# Altium PCB UART_Logger.PcbDoc
Units mm, origin at the board's own origin, x right, y up, seen from the top; angles counter-clockwise.
Board outline 33.25 x 36.95 mm, 2 copper layers (Top Layer, Bottom Layer); 56 components, 48 nets, 230 pads, 111 vias.
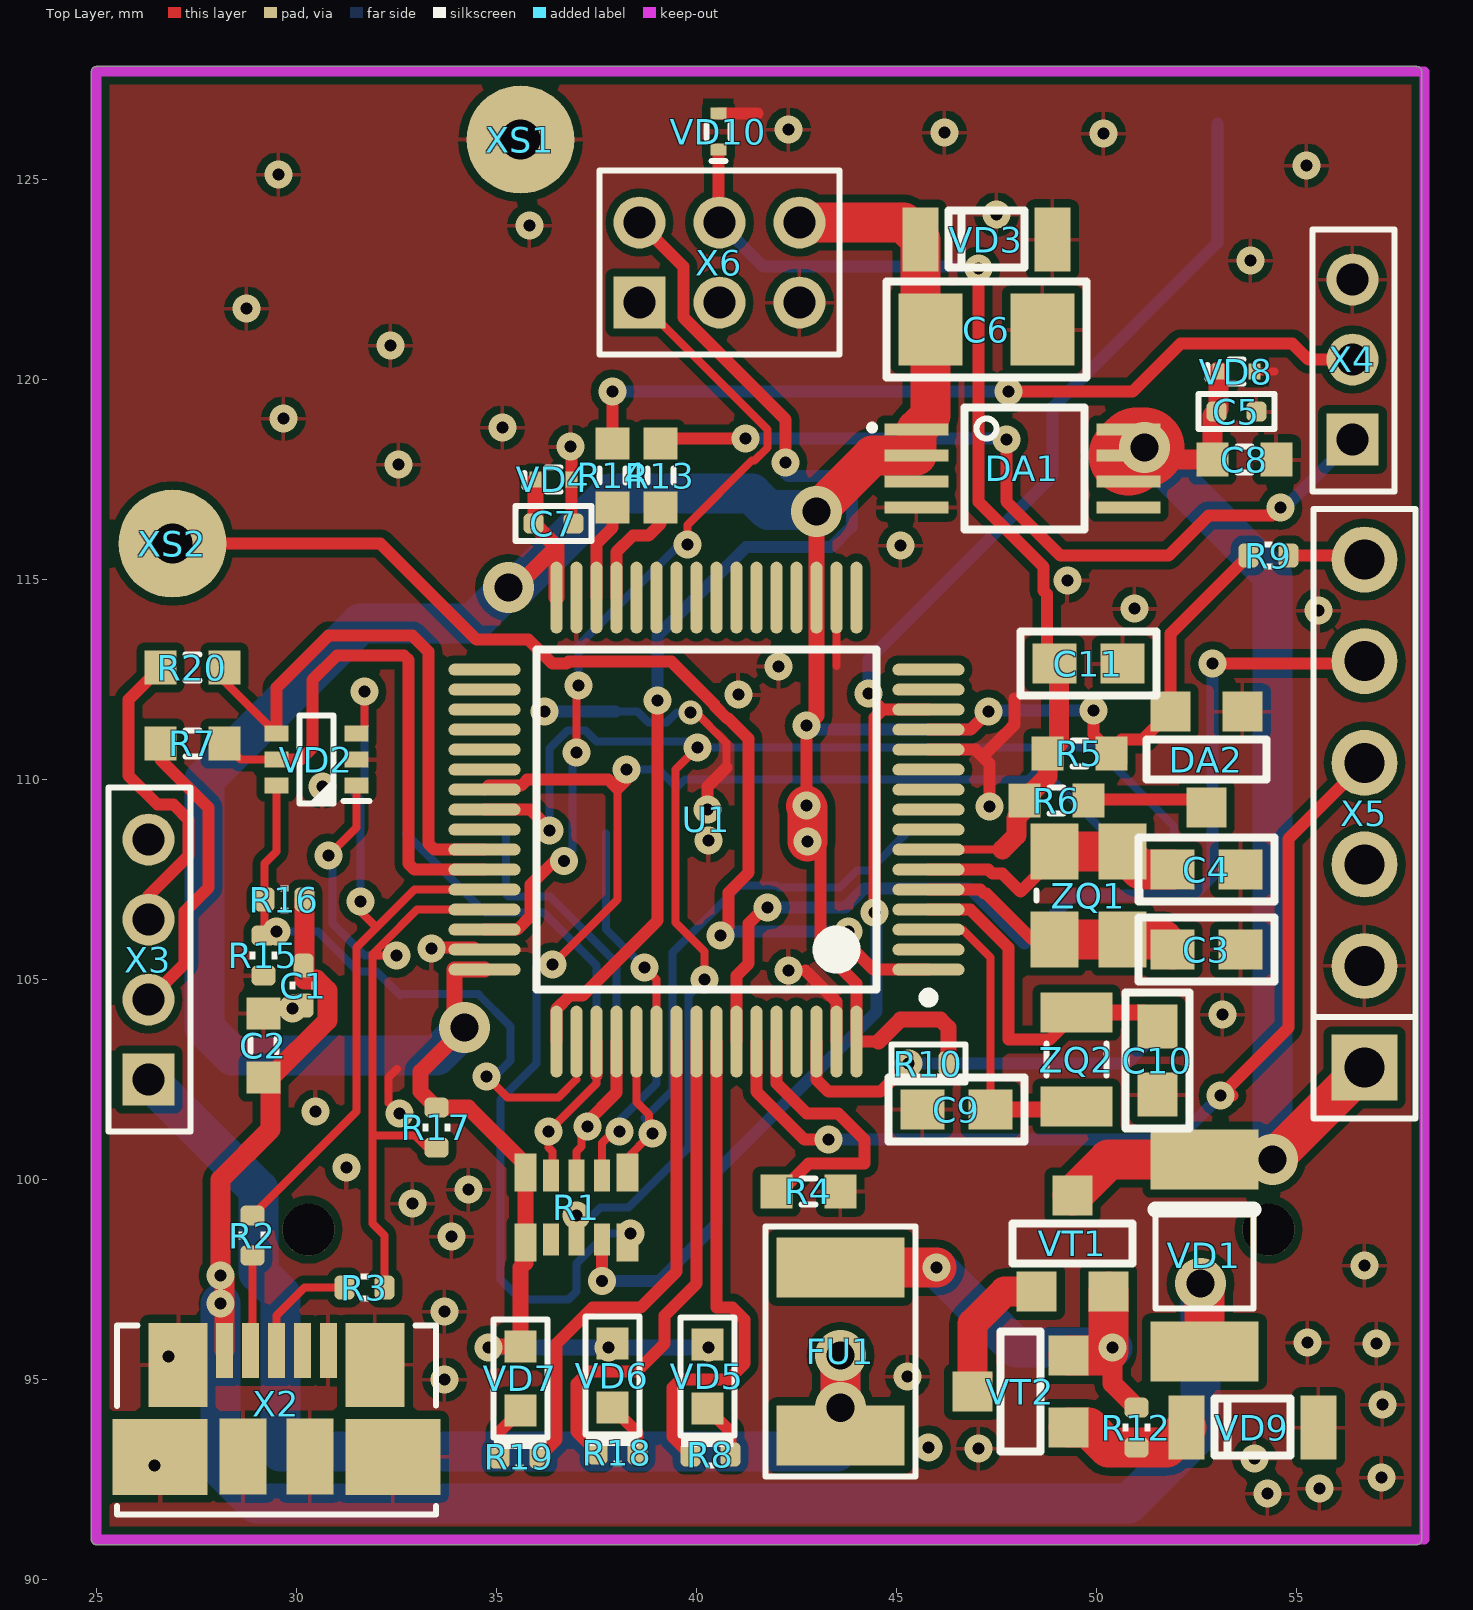
[diagram p0: Top Layer view]
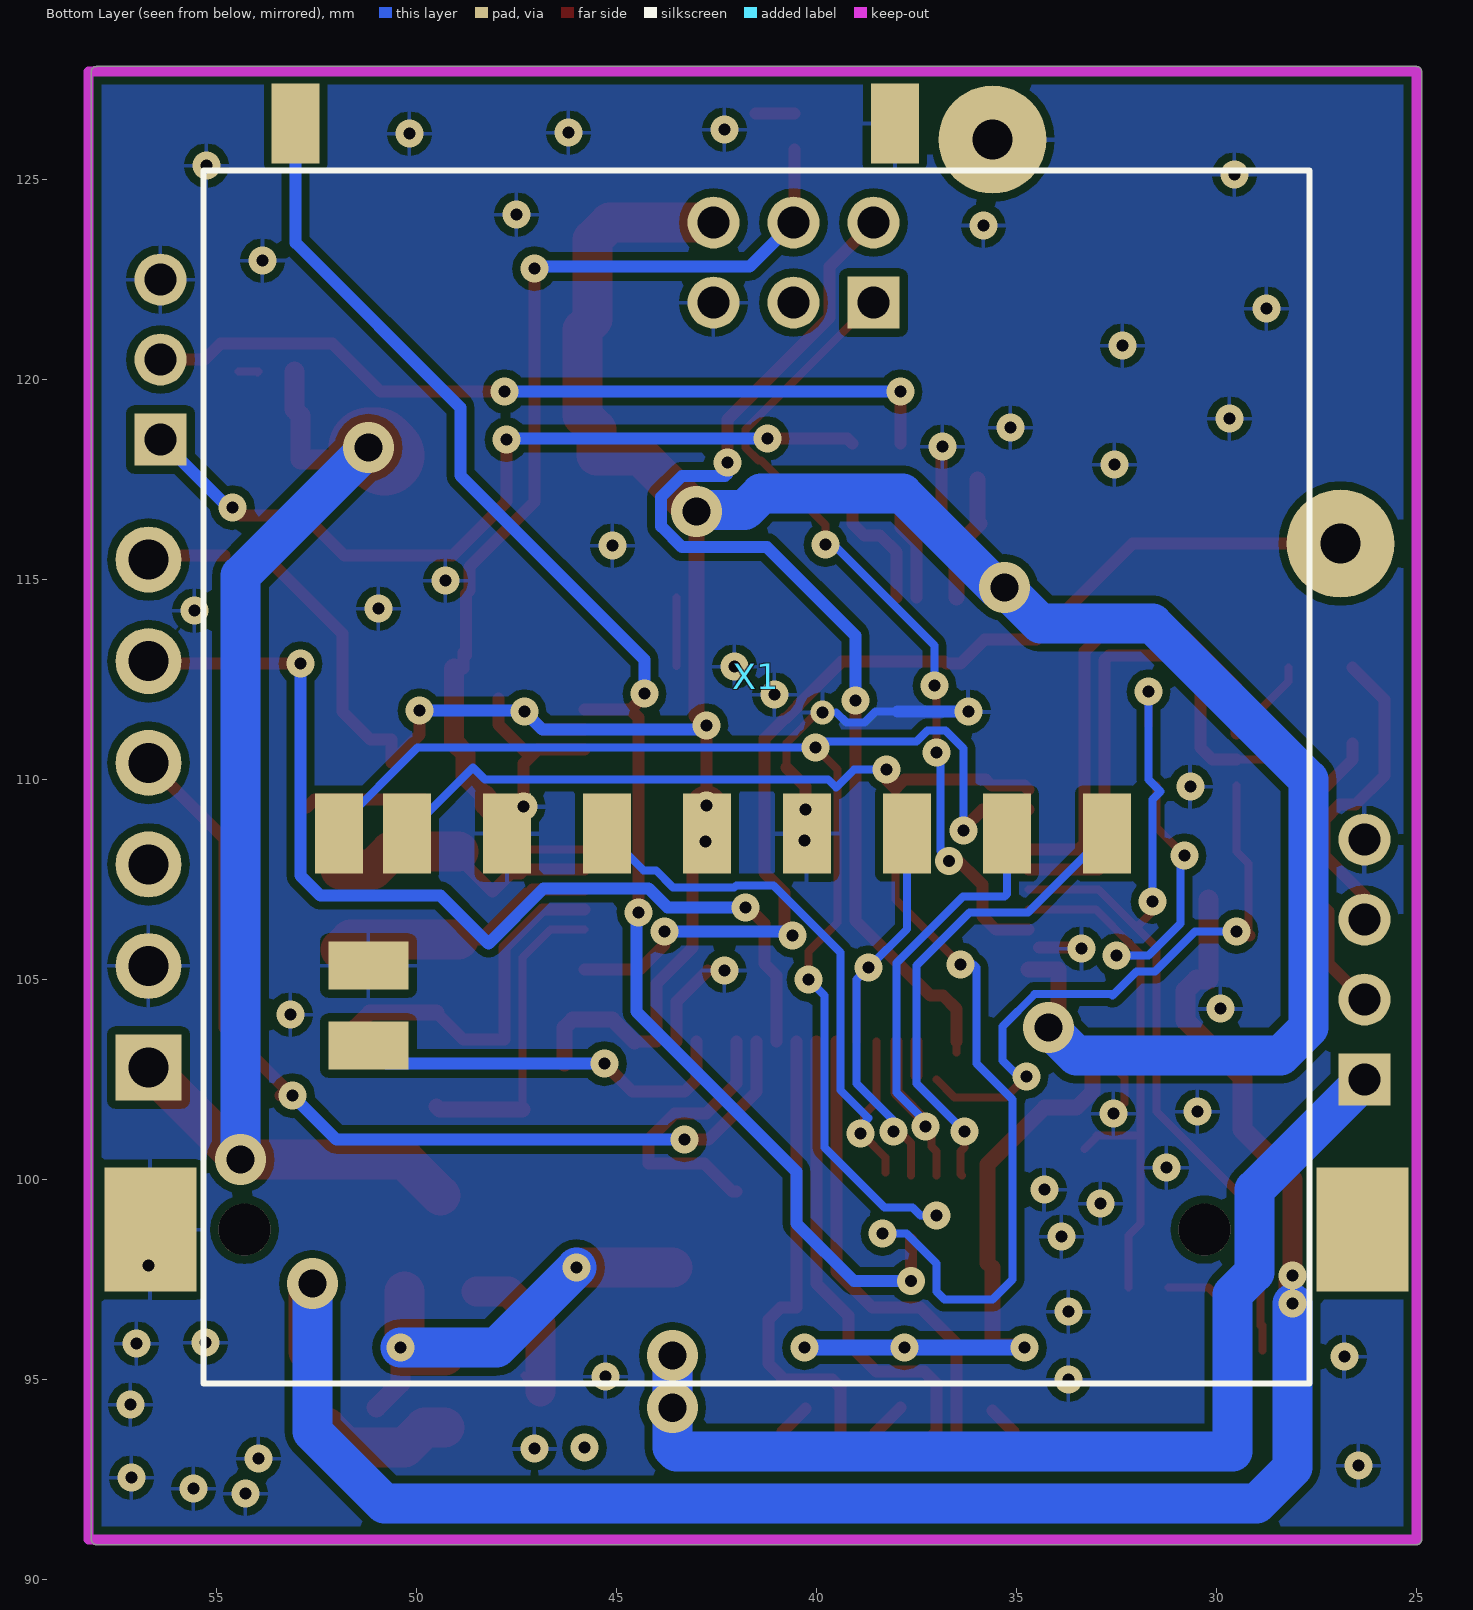
[diagram p1: Bottom Layer view, seen from below]
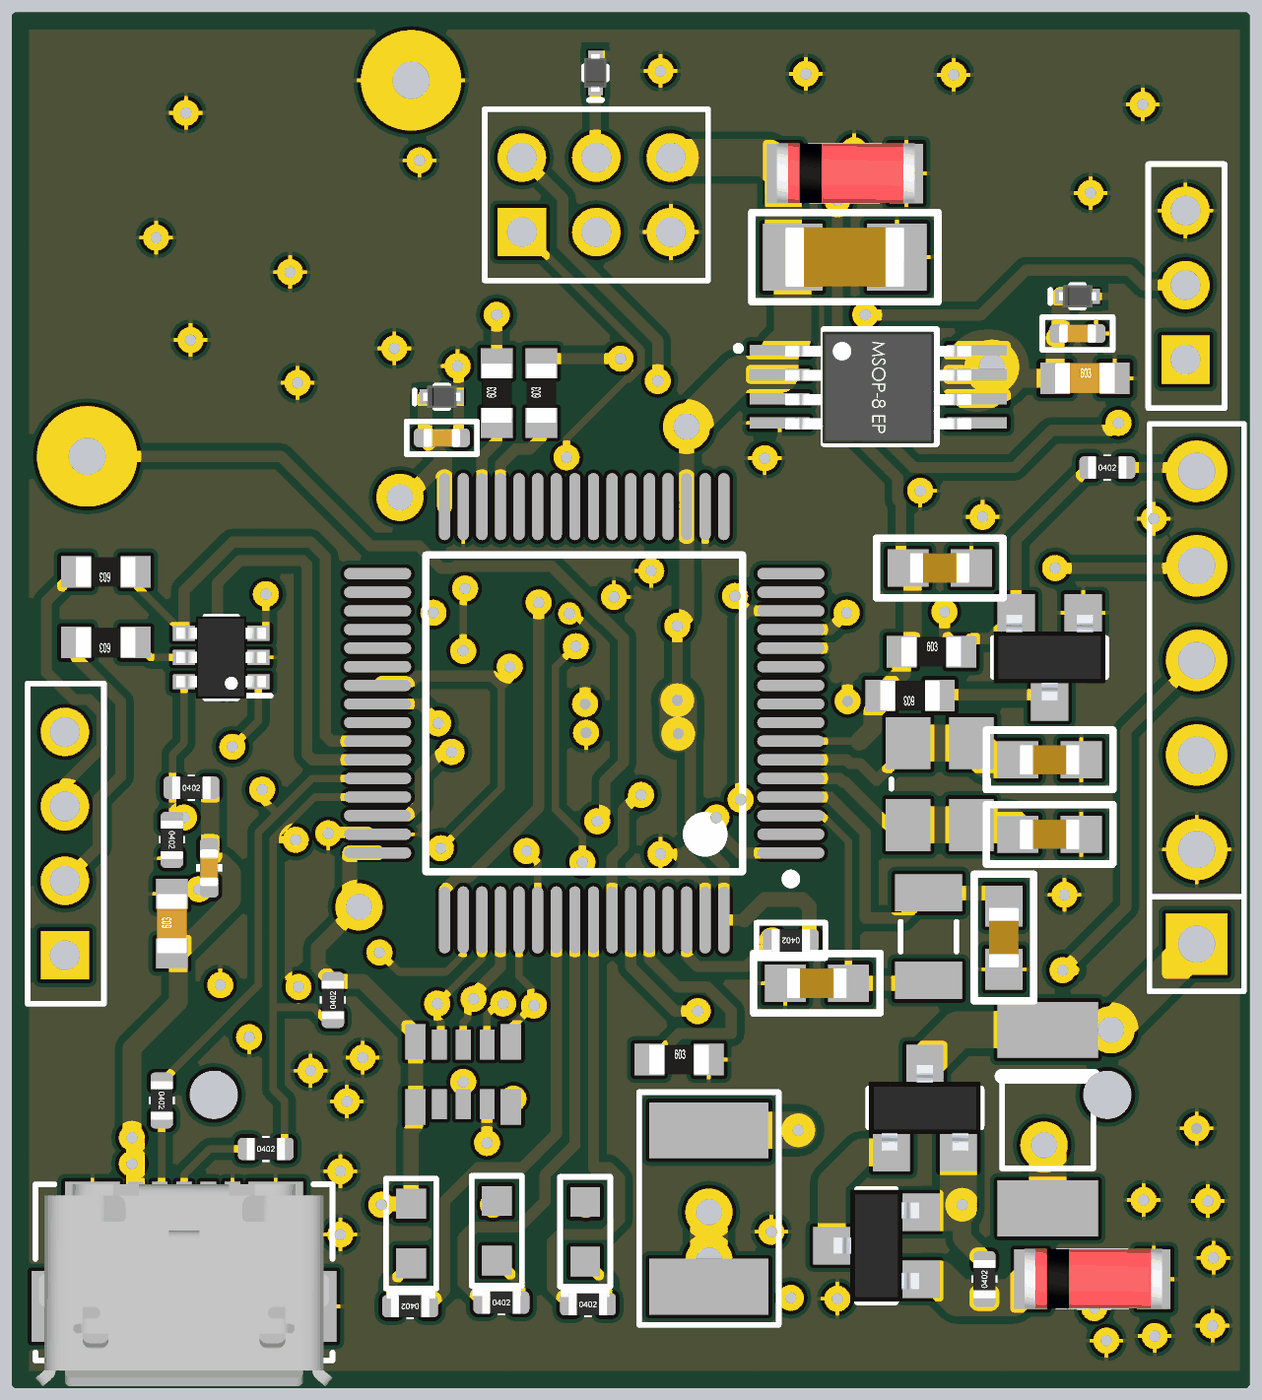
[diagram p2: 3D render of the assembled board from above, using the file's embedded part models]

## Layer stack, top to bottom
Top Solder: solder mask 0.0102, Solder Resist, Dk 3.5
Top Layer: signal copper 0.0356
Dielectric 1: dielectric 0.32, FR-4, Dk 4.8
Bottom Layer: signal copper 0.0356
Bottom Solder: solder mask 0.0102, Solder Resist, Dk 3.5

## Board outline
25.002,90.873 cw(c25,91) 24.873,91 24.873,127.7 cw(c25,127.7) 25,127.827 58,127.827 cw(c58,127.7) 58.127,127.7 58.127,91 cw(c58,91) 58,90.873

## Design rules (kind name [scope] priority, off if disabled: settings)
Clearance "Any-same nets" [All] p1: gap=0.1 ignorepadtopadclearanceinfootprint=FALSE except(0: Arc-Hole Track-Hole SMDPad-Hole THPad-Hole Via-Hole Fill-Hole Poly-Hole Region-Hole Text-Hole; 0.2: Arc-Poly Track-Track Track-Poly SMDPad-Poly THPad-Poly Via-Poly Fill-Poly Poly-Poly) // все, кроме настроек одинаковых цепей
DiffPairsRouting [All] p1: maxlimit=0.5 minlimit=0.1 mostfreqgap=0.2 toplayer_minwidth=0.1 toplayer_maxwidth=0.4 toplayer_prefwidth=0.3 bottomlayer_minwidth=0.1 bottomlayer_maxwidth=0.4 bottomlayer_prefwidth=0.3 maxuncoupledlength=0.2
MatchedLengths MatchLengths_xSignals_U1_ZQ2 [InxSignalClass('xSignals_U1_ZQ2_MatchLengthsClass')] p1: tolerance=1 checknetsindiffpair=FALSE checkdiffpairvsdiffpair=TRUE checkxsignals=TRUE checkothers=TRUE
MatchedLengths MatchLengths_U1_Passives_X2 [InxSignalClass('xSignals_U1_Passives_X2_MatchLengthsClass')] p2: tolerance=1 checknetsindiffpair=FALSE checkdiffpairvsdiffpair=TRUE checkxsignals=TRUE checkothers=TRUE
MatchedLengths MatchLengths_xSignals_U1_Passives [InxSignalClass('xSignals_U1_Passives_MatchLengthsClass')] p3: tolerance=1 checknetsindiffpair=FALSE checkdiffpairvsdiffpair=TRUE checkxsignals=TRUE checkothers=TRUE
MatchedLengths MatchLengths_xSignals_U1_X2 [InxSignalClass('xSignals_U1_X2_MatchLengthsClass')] p4: tolerance=1 checknetsindiffpair=FALSE checkdiffpairvsdiffpair=TRUE checkxsignals=TRUE checkothers=TRUE
MatchedLengths [All] p5: tolerance=1 checknetsindiffpair=TRUE checkdiffpairvsdiffpair=FALSE checkxsignals=FALSE checkothers=FALSE
PlaneClearance [All] p1: clearance=0.5
PlaneConnect [All] p1: planeconnectstyle=Relief reliefexpansion=0.508 reliefentries=2 reliefconductorwidth=0.1 reliefairgap=0.3
PolygonConnect [All] p1: connectstyle=Relief reliefconductorwidth=0.1 reliefentries=4 polygonreliefangle="90 Angle" airgapwidth=0.2
RoutingVias [All] p1: holewidth=0.3 width=0.7 viastyle="Through Hole" minholewidth=0.3 minwidth=0.6 maxholewidth=0.7 maxwidth=1.27
SolderMaskExpansion [All] p1: expansion=0.102
Width IN [InNet('IN')] p1: maxlimit=5 minlimit=0.5 preferedwidth=2
Width 3V3 [InNet('3V3')] p2: maxlimit=1 minlimit=0.2 preferedwidth=0.4
Width [All] p3: maxlimit=2 minlimit=0.2 preferedwidth=0.3
27 further rules are at their usual default settings.

## Components (designator, comment, footprint, x,y, rotation, side; value= is the part's Value field where it differs from the comment)
C1 "C0402-X7R-16В-0.1мкФ" C0402_min 30.175,104.85 r90 top value="0.1 мкФ"
C2 "C0603-X5R-6.3В-4.7мкФ±20%" C0603_HD 29.175,103.35 r90 top value="4.7 мкФ"
C3 "C0603-X7R-50В-12нФ" C0603 52.75,105.75 r0 top value="12 нФ"
C4 "C0603-X7R-50В-12нФ" C0603 52.75,107.75 r0 top value="12 нФ"
C5 "C0402-X7R-16В-0.1мкФ-10%" C0402_HD 53.5,119.2 r180 top value="0.1 мкФ"
C6 "C1206-X5R-10В-47мкФ-20%" C1206 47.25,121.25 r180 top value="47 мкФ"
C7 "C0402-X7R-16В-0.1мкФ-10%" C0402_HD 36.425,116.4 r180 top value="0.1 мкФ"
C8 "C0603-X5R-16В-10мкФ" C0603_HD 53.7,118 r0 top value="10 мкФ"
C9 "C0603-X7R-50В-7 нФ" C0603 46.5,101.75 r180 top value="7 нФ"
C10 "C0603-X7R-50В-7 нФ" C0603 51.525,102.975 r270 top value="7 нФ"
C11 "C0603-X7R-50В-22нФ" C0603 49.8,112.9 r180 top value="22 нФ"
DA1 "NCP3335ADM330R2G" TSSOP-8 45.5,118.75 r0 top
DA2 "MAX809SEUR, LM809M3-2.93 (NSC), STM809SWX6F (ST)" SOT-23 52.75,110.5 r180 top
FU1 "MF-MSMF020/60-2" MF-MSMF020/60 43.6,93.6 r90 top
R1 "CAY17-103JA" CAY17-103JALF 37,99.3 r180 top
R2 "R0402-39Ом-5%" R0402_min 28.9,98.6 r270 top value="39 Ом"
R3 "R0402-39Ом-5%" R0402_min 31.7,97.3 r0 top value="39 Ом"
R4 "R0603-10кОм-5%" R0603_HD 42.8,99.7 r0 top value="10 кОм"
R5 "R0603-10кОм-5%" R0603_HD 49.575,110.65 r0 top value="10 кОм"
R6 "R0603- 4.7 кОм-5%" R0603_HD 49,109.475 r180 top value="4.7 кОм"
R7 "R0603-10Ом-5%" R0603_HD 27.4,110.9 r180 top value="10 Ом"
R8 "R0402-1кОм-5%" R0402_min 40.35,93.125 r0 top value=1кОм
R9 "R0402-1кОм-5%" R0402_min 54.3,115.6 r0 top value=1кОм
R10 "R0402-10кОм-5%" R0402_HD 45.8,102.9 r180 top value="10 кОм"
R12 "R0402-10кОм-5%" R0402_min 51,93.8 r90 top value=10кОм
R13 "R0603-10Ом-5%" R0603_HD 39.1,117.6 r90 top value="10 Ом"
R14 "R0603-10Ом-5%" R0603_HD 37.9,117.6 r90 top value="10 Ом"
R15 "R0402-39кОм-5%" R0402_min 29.175,105.6 r270 top value="39 кОм"
R16 "R0402-24кОм-5%" R0402_min 29.7,107 r0 top value="24 кОм"
R17 "R0402-1кОм-5%" R0402_min 33.5,101.3 r90 top value=1кОм
R18 "R0402-1кОм-5%" R0402_min 38.025,93.175 r0 top value=1кОм
R19 "R0402-1кОм-5%" R0402_min 35.575,93.075 r180 top value=1кОм
R20 "R0603-10Ом-5%" R0603_HD 27.4,112.8 r180 top value="10 Ом"
U1 "STM32F103RCT6" STM-LQFP64_N 40.25,109 r180 top
VD1 "SM4007" DO-213AB_ 52.7,98.1 r270 top
VD2 "SMF05C" SOT-363 30.5,110.5 r180 top
VD3 "BZV55-C3V6" sod80c 47.25,123.5 r180 top
VD4 "ESD9L3.3ST5G" "SOD-923 (ON)" 36.425,117.5 r0 top
VD5 "KP1608ZGC" LED_0603 40.275,95.075 r270 top
VD6 "KP1608ZGC" LED_0603 37.9,95.1 r270 top
VD7 "KP1608ZGC" LED_0603 35.6,95.025 r270 top
VD8 "ESD9L5.0ST5G" "SOD-923 (ON)" 53.5,120.2 r0 top
VD9 "BZV55-C5V6" sod80c 53.9,93.8 r180 top
VD10 "ESD9L3.3ST5G" "SOD-923 (ON)" 40.55,126.2 r90 top
VT1 "MMBTA42" SOT-23 49.4,98.4 r0 top
VT2 "MMBTA42" SOT-23 48.1,94.7 r90 top
X1 "Attend 104G-TAA0-R" "Attend 104G-TAA0-R (SD holder)" 42.3,94.9 r180 bottom
X2 "Molex 47346-1001" "MicroUSB 047346-0001 Molex" 29.5,94.4 r90 top
X3 "n/m PLS-4" PLS2-4 26.3,102.5 r0 top
X4 "n/m" pls2-3 56.4,118.5 r0 top
X5 "n/m PLS-6" PLS-06 56.7,102.8 r90 top
X6 "n/m" PLD2-6 38.575,121.925 r0 top
XS1 "CONNECT PAD" Connection_pad 35.6,126 r0 top
XS2 "CONNECT PAD" Connection_pad 26.9,115.9 r0 top
ZQ1 "DSX321G 12 MHz, 10ppm@25C, 20ppm@-40+85C, 80 Ohm, 12pF (1C212000AB0AB)" DSX321G 49.8,107.1 r270 top value="12 МГц"
ZQ2 "DST310S 32.768 kHz, 20ppm, 50 kOhm, 7pF (1TJF0SPDJ1AI00D)" DST310S 49.5,103 r270 top value="32.768 кГц"

## Footprints (in the part's own frame and the unit in brackets; to place one, negate y for a bottom-side part, rotate by r counter-clockwise, add the part's x,y. Pads: shape width x height; smd on the part's side, far side on the other; paste and mask are expansions set on the pad)
"Attend 104G-TAA0-R (SD holder)" [mm]
  rect 1.2x2 smd: 1(7.06,13.75) 2(4.56,13.75) 3(2.06,13.75) 4(-0.44,13.75) 5(-2.94,13.75) 6(-5.44,13.75) 7(-7.94,13.75) 8(-9.64,13.75) 9(9.56,13.75) CD(-10.72,31.5) GND(4.26,31.5)
  rect 2.3x3.1 smd: GND(-14.35,3.85) Mount(15.95,3.85)
  rect 2x1.2 smd: GND(-8.9,10.45) WP(-8.9,8.45)
  round 1.3 hole 1.3 unplated: "Mount Hole"(-12,3.85) "Mount Hole"(12,3.85)
  silkscreen extent -13.02,0 14.62,30.32, body extent -13.03,0 14.62,30.32, height 3.3
C0402_HD [mm]
  rrect50% 0.5x0.5 smd: 1(0.5,0) 2(-0.5,0)
  silkscreen extent -0.95,-0.44 0.94,0.44, body extent -0.5,-0.25 0.5,0.25, height 0.48
C0402_min [mm]
  rrect50% 0.6x0.5 smd: 1(-0.5,0) 2(0.5,0)
  silkscreen extent -0.1,-0.35 0.1,0.35, body extent -0.5,-0.25 0.5,0.25, height 0.48
C0603 [mm] "1608M"
  rect 1.1x1 smd: 1(-0.85,0) 2(0.85,0)
  silkscreen extent -1.7,-0.8 1.7,0.8, body extent -0.8,-0.4 0.8,0.4, height 0.91
C0603_HD [mm]
  rect 0.8x0.85 smd: 1(-0.8,0) 2(0.8,0)
  silkscreen extent -0.17,-0.32 0.17,0.33, body extent -0.8,-0.4 0.8,0.4, height 0.3
C1206 [mm] "3216M"
  rect 1.6x1.8 smd: 1(-1.4,0) 2(1.4,0)
  silkscreen extent -2.5,-1.2 2.5,1.2, body extent -1.6,-0.8 1.6,0.8, height 1.01
CAY17-103JALF [mm]
  rect 0.55x0.95 smd: 1(-1.28,-0.875) 5(1.28,-0.875) 6(-1.28,0.875) 10(1.28,0.875)
  rect 0.4x0.8 smd: 2(-0.64,-0.8) 3(0,-0.8) 4(0.64,-0.8) 7(-0.64,0.8) 8(0,0.8) 9(0.64,0.8)
Connection_pad [mm]
  round 2.7 hole 1: 1(0,0)
DO-213AB_ [mm]
  rect 1.5x2.7 smd: 1(2.4,0) 2(-2.4,0)
  silkscreen extent -1.15,-1.22 1.33,1.22, body extent -2.52,-1.25 2.48,1.25, height 2.5
DST310S [mm]
  rect 1x1.8 smd: 1(-1.175,0) 2(1.175,0)
  silkscreen extent -0.4,-0.75 0.4,0.75, body extent -1.6,-0.75 1.6,0.75, height 0.85
DSX321G [mm]
  rect 1.4x1.2 smd: 1(-1.1,-0.85) 2(1.1,-0.85) 3(1.1,0.85) 4(-1.1,0.85)
  silkscreen extent -0.13,-1.3 0.13,1.3, body extent -1.6,-1.3 1.6,1.3, height 1
LED_0603 [mm]
  rect 0.8x0.8 smd: 1(-0.8,0) 2(0.8,0)
  silkscreen extent -1.47,-0.67 1.75,0.67, body extent -0.8,-0.4 0.8,0.4, height 1.1
MF-MSMF020/60 [mm]
  rect 1.5x3.2 smd: 1(0,0) 2(4.2,0)
  silkscreen extent -1.03,-1.87 5.23,1.88, body extent -0.63,-1.7 4.83,1.7, height 1
"MicroUSB 047346-0001 Molex" [mm]
  rect 1.38x0.42 smd mask+0.1: 1(1.33,1.3) 2(1.33,0.65) 3(1.33,0) 4(1.33,-0.65) 5(1.33,-1.3)
  rect 1.9x2.375 smd mask+0.1: 6(-1.33,2.912) 6(-1.33,-2.912)
  rect 1.9x1.175 smd mask+0.1: 6(-1.329,-0.836) 6(-1.329,0.836)
  rect 2.1x1.475 smd mask+0.1: 6(0.97,2.462) 6(0.97,-2.462)
  silkscreen extent -2.78,-3.99 1.95,3.99, body extent -3.48,-3.99 1.95,3.99, height 2.67
PLD2-6 [mm]
  rect 1.3x1.3 hole 0.8: 1(0,0)
  round 1.3 hole 0.8: 2(0,2) 3(2,0) 4(2,2) 5(4,0) 6(4,2)
  silkscreen extent -1,-1.3 5,3.3
pls2-3 [mm]
  rect 1.3x1.3 hole 0.8: 1(0,0)
  round 1.3 hole 0.8: 2(0,2) 3(0,4)
  silkscreen extent -1,-1.3 1.05,5.25
PLS2-4 [mm]
  rect 1.3x1.3 hole 0.8: 1(0,0)
  round 1.3 hole 0.8: 2(0,2) 3(0,4) 4(0,6)
  silkscreen extent -1,-1.3 1.05,7.3
PLS-06 [mm]
  rect 1.65x1.65 hole 1: 1(0,0)
  round 1.65 hole 1: 2(2.54,0) 3(5.08,0) 4(7.62,0) 5(10.16,0) 6(12.7,0)
  silkscreen extent -1.27,-1.27 13.97,1.27
R0402_HD [mm]
  rrect50% 0.5x0.6 smd: 1(-0.5,0) 2(0.5,0)
  silkscreen extent -0.92,-0.48 0.92,0.48, body extent -0.52,-0.3 0.52,0.3, height 0.34
R0402_min [mm]
  rrect50% 0.5x0.6 smd: 1(-0.5,0) 2(0.5,0)
  silkscreen extent -0.1,-0.35 0.1,0.35, body extent -0.52,-0.3 0.52,0.3, height 0.34
R0603_HD [mm]
  rect 0.8x0.85 smd: 1(-0.8,0) 2(0.8,0)
  silkscreen extent -0.18,-0.32 0.17,0.33, body extent -0.8,-0.4 0.8,0.4, height 0.3
sod80c [mm]
  rect 0.9x1.6 smd: 1(-1.65,0) 2(1.65,0)
  silkscreen extent -0.95,-0.73 0.95,0.7, body extent -1.88,-0.81 1.82,0.79, height 1.61
"SOD-923 (ON)" [mm]
  rect 0.3x0.4 smd mask+0.05: 1(-0.45,0) 2(0.45,0)
  Top Layer pour cut-out: 0.075,0.375 0.825,0.375 0.825,-0.375 0.075,-0.375
  Top Layer pour cut-out: -0.075,-0.375 -0.825,-0.375 -0.825,0.375 -0.075,0.375
  silkscreen extent -0.73,-0.3 0.17,0.3, body extent -0.5,-0.3 0.5,0.3, height 0.4
SOT-23 [mm] "КТ-46"
  rect 1x1 smd: 1(-0.9,-1.2) 2(0,1.2) 3(0.9,-1.2)
  silkscreen extent -1.5,-0.5 1.5,0.5, body extent -1.5,-1.15 1.5,1.15, height 1.11
SOT-363 [mm]
  rect 0.6x0.4 smd: 1(-1,0.65) 2(-1,0) 3(-1,-0.65) 4(1,-0.65) 5(1,0) 6(1,0.65)
  silkscreen extent -1.33,-1.1 0.43,1.1, body extent -1.2,-1.1 1.2,1.1, height 1.1
STM-LQFP64_N [mm] "Thin QFP, 64-Leads, Body 10x10mm, Pitch 0.5mm, IPC Medium Density"
  oval 1.8x0.3 smd: 1(-5.55,3.75) 2(-5.55,3.25) 3(-5.55,2.75) 4(-5.55,2.25) 5(-5.55,1.75) 6(-5.55,1.25) 7(-5.55,0.75) 8(-5.55,0.25) 9(-5.55,-0.25) 10(-5.55,-0.75) 11(-5.55,-1.25) 12(-5.55,-1.75) 13(-5.55,-2.25) 14(-5.55,-2.75) 15(-5.55,-3.25) 16(-5.55,-3.75) 33(5.55,-3.75) 34(5.55,-3.25) 35(5.55,-2.75) 36(5.55,-2.25) 37(5.55,-1.75) 38(5.55,-1.25) 39(5.55,-0.75) 40(5.55,-0.25) 41(5.55,0.25) 42(5.55,0.75) 43(5.55,1.25) 44(5.55,1.75) 45(5.55,2.25) 46(5.55,2.75) 47(5.55,3.25) 48(5.55,3.75)
  oval 0.3x1.8 smd: 17(-3.75,-5.55) 18(-3.25,-5.55) 19(-2.75,-5.55) 20(-2.25,-5.55) 21(-1.75,-5.55) 22(-1.25,-5.55) 23(-0.75,-5.55) 24(-0.25,-5.55) 25(0.25,-5.55) 26(0.75,-5.55) 27(1.25,-5.55) 28(1.75,-5.55) 29(2.25,-5.55) 30(2.75,-5.55) 31(3.25,-5.55) 32(3.75,-5.55) 49(3.75,5.55) 50(3.25,5.55) 51(2.75,5.55) 52(2.25,5.55) 53(1.75,5.55) 54(1.25,5.55) 55(0.75,5.55) 56(0.25,5.55) 57(-0.25,5.55) 58(-0.75,5.55) 59(-1.25,5.55) 60(-1.75,5.55) 61(-2.25,5.55) 62(-2.75,5.55) 63(-3.25,5.55) 64(-3.75,5.55)
  silkscreen extent -5.68,-4.25 4.25,4.57, body extent -5,-5 5,5, height 1.6
TSSOP-8 [mm]
  rect 1.6x0.3 smd: 1(0,0) 2(0,-0.65) 3(0,-1.3) 4(0,-1.95) 5(5.3,-1.95) 6(5.3,-1.3) 7(5.3,-0.65) 8(5.3,0)
  silkscreen extent -1.18,-2.5 4.2,0.55, body extent 0.15,-2.5 5.15,0.5, height 1.09

## Part data
C1 C3 C4 C9 C10 C11: library part C0603
C2 C8: library part C0603_HD
C5 C7: library part C0402
C6: library part C1206
DA1: library part ADP3335ARM-3.3
DA2: library part LM809M3-2.93
FU1: library part MF-MSMF
R1: library part CAY17
R2 R3 R8 R9 R10 R12 R15 R16 R17 R18 R19: library part R0402
R4 R5 R6 R7 R13 R14 R20: library part R0603
U1: "ARM Cortex-M3 32-bit MCU, 256 KB Flash, 48 KB Internal RAM, 51 I/Os, 64-pin LQFP, -40 to 85 degC, Tray", I/Os (High Current)=51, Operating Frequency(F) (Processor speed) (MHz)=72, Supplier Part Number 1=497-9033-ND, Supply Voltage(Vcc) min (V)=2, A/D Converter="3x12-bit (16 Channel)", ComponentLink1Description="Manufacturer URL", ComponentLink1URL=http://www.st.com/web/en/home.html, ComponentLink2Description=Datasheet, ComponentLink2URL=http://www.st.com/st-web-ui/static/active/en/resource/technical/document/datasheet/CD00191185.pdf, ComponentLink3Description="Package Specification", ComponentLink3URL=http://www.st.com/st-web-ui/static/active/en/resource/technical/document/datasheet/DM00037051.pdf, Core="ARM Cortex-M3", D/A Converter="2x12-bit (2 Channel)", DatasheetVersion="Rev. 8", FLASH Size (Prog) (kB)=256, Internal RAM Size (kB)=48, Mounting Technology="Surface Mount", PackageDescription="64-Pin Low Profile Quad Flat Package, 10 x 10 mm Body, 0.5 mm Pitch", PackageReference=LQFP64, PackageVersion="Rev. 4, 06/2013", Packing=Tray, PartNumber=STM32F103RCT6, Supplier 1=Digi-Key, Supplier 2=Newark, Supplier 3=Newark, Supplier 4=Mouser, Supplier Part Number 2=01P4099, Supplier Part Number 3=57P1227, Supplier Part Number 4=511-STM32F103RCT6
VD1: library part SM400x
VD3 VD9: library part BZV55
VD5 VD6 VD7: library part LED_0603
VT1 VT2: library part MMBT5551
X1: library part "Attend 104G-TAA0-R (SD holder)"
X2: library part "MicroUSB 047346-0001 Molex"
X3: library part PLS2-4
X4: library part PLS2-3
X5: library part PLS-6
X6: library part PLD2-6
ZQ1: library part DSX321G

## Via types
v1: diameter 0.7, hole 0.3, Top Layer to Bottom Layer, 102 vias
v2: diameter 1.27, hole 0.7, Top Layer to Bottom Layer, 7 vias
v3: diameter 1.27, hole 0.711, Top Layer to Bottom Layer, 1 vias
v4: diameter 0.6, hole 0.3, Top Layer to Bottom Layer, 1 vias

## Nets (pads, with @x,y where several pads share a name; then routed paths per layer and width w, separated by ;. In a path a pad name is that pad's centre, name@x,y a point inside that pad or via, vN(x,y) a via of type N, cw(c..) or ccw(c..) an arc to the next point about the centre after c; other vN are vias at no path point)
3V3: C6.2 C7.1 DA1.1 DA1.2 DA1.3 DA2.3 R1.5 R1.10 R5.2 R9.1 R10.1 R17.2 U1.13 U1.19 U1.32 U1.48 U1.64 VD3.2 VD4.1 VD5.1 VD6.1 VD7.1 X1.4 X6.6 | length 102.3
  Top Layer w0.3: v1(42.75,109.35) v1(42.75,111.35) ; 43.1,108.85 43.1,108.45 43.1,105.8 44,104.9 U1.64 44.55,103.45 ; U1.13 46.85,111.25 v1(47.3,111.7) ; v1(49.925,111.725) 49.925,111.125 50.388,110.662 50.625,110.425 50.625,110.65 50.625,111 51.15,111 DA2.3 51.85,113.65 R9.1
  Top Layer w0.4: U1.48 33.95,105.25 33.95,104.05 v2(34.2,103.8) 33.1,102.7 33.1,102.2 R17.2 34.3,101.8 35.72,100.38 R1.5 R1.10 35.72,97.92 35.6,97.8 VD7.1 34.825,95.825 v1(34.8,95.8) ; v2(35.3,114.8) 35.475,114.8 36.5,115.825 ; VD4.1 35.975,116.45 C7.1 36.5,115.825 ; U1.32 36.5,115.825 ; v1(42.75,111.35) 43,111.6 U1.19 v2(43,116.7) ; 44.55,103.45 45.1,104 46.1,104 46.3,103.8 R10.1
  Top Layer w1: X6.6 45.175,123.925 VD3.2 45.6,121.5 C6.2 45.85,119.1 DA1.1 DA1.2 44.4,118.1 v2(43,116.7) ; v1(42.75,109.35) 42.74,109.34 42.775,109.305 v1(42.775,108.45)
  Bottom Layer w0.3: v1(42.75,111.35) 42.75,111.25 46.85,111.25 v1(47.3,111.7) 47.325,111.725 v1(49.925,111.725)
  Bottom Layer w0.4: v1(34.8,95.8) v1(37.8,95.8) v1(40.3,95.8)
  Bottom Layer w1: v2(34.2,103.8) 33.5,103.1 28.4,103.1 27.7,103.8 27.7,110 31.6,113.9 34.4,113.9 v2(35.3,114.8) 35.5,114.8 37.85,117.15 41.381,117.15 41.796,116.735 42.965,116.735 v2(43,116.7)
GND: C1.1 C2.2 C3.2 C4.2 C5.2 C6.1 C7.2 C8.2 C9.2 C10.2 C11.1 DA1.4 DA2.1 R4.2 R15.2 U1.12 U1.18 U1.31 U1.47 U1.63 VD2.2 VD3.1 VD4.2 VD8.2 VD9.1 VD10.2 X1.3 X1.6 X1.GND X2.5 X2.6 X3.4 X4.3 X5.2 X6.5 XS1.1 | length 20.8
  Top Layer w0.2: 32.516,102.766 32.3,102.55 32.3,101.91 32.315,101.91 v1(32.575,101.65) ; C7.2@36.875,116.45 C7.2 ; v4(39.852,111.68) 39.896,111.725 39.936,111.725 40.75,110.911 40.75,110.3 ; 43.5,112.842 U1.18 ; VD8.2@53.975,120.175 VD8.2 54.45,120.2
  Top Layer w0.3: v1(33.375,105.775) 33.4,105.8 U1.47@34.443,105.8 ; v1(36.85,118.325) 36.875,118.3 VD4.2 C7.2@36.875,116.45 ; v1(40.275,109.25) 40.275,109.825 40.75,110.3 ; VD10.2 41.525,126.65 ; 42.725,105.225 43.5,104.45 U1.63 ; U1.12 46.975,110.75 47.15,110.575 ; v1(47.325,109.325) 47.325,110.4 47.15,110.575 ; 47.95,112.025 47.95,111.375 47.15,110.575
  Bottom Layer w0.2: 37.975,111.7 38.522,111.7 38.797,111.425 39.253,111.425 39.508,111.68
  Bottom Layer w0.3: v1(36.2,111.7) 37.975,111.7
  other v1: 54.275,92.15 55.575,92.275 57.125,92.55 26.45,92.85 53.95,93.025 47.05,93.275 57.15,94.375 33.7,95 45.275,95.075 26.8,95.575 57,95.9 55.275,95.925 33.7,96.7 56.7,97.85 33.875,98.575 32.9,99.4 34.3,99.75 31.25,100.3 30.475,101.7 53.15,104.125 29.9,104.275 42.3,105.225 40.3,108.475 30.65,109.825 41.05,112.125 42.05,112.825 55.55,114.225 50.95,114.275 49.275,114.975 45.1,115.85 32.55,117.875 35.15,118.8 29.675,119.025 32.35,120.85 28.75,121.775 53.85,122.975 35.825,123.85 47.5,124.125 29.55,125.125 55.25,125.35 50.175,126.15 46.2,126.175 42.3,126.25
IN: C5.1 C8.1 DA1.6 DA1.7 DA1.8 VD1.2 VD8.1 VT1.2 X5.1 | length 32.3
  Top Layer w0.5: v2(51.2,118.3) 51.5,118 C8.1 52.9,119.1 C5.1 53.05,119.25 VD8.1
  Top Layer w1: VT1.2 50.3,100.5 VD1.2 v2(54.4,100.5) X5.1
  Top Layer w2: DA1.7 51,118.3 v2(51.2,118.3)
  Bottom Layer w1: v2(51.2,118.3) 54.4,115.1 v2(54.4,100.5)
NetC1_2: C1.2 C2.1 R16.2 VD1.1 X2.1 | length 48
  Top Layer w0.5: X2.1 28.2,96.9 28.2,97.5 v1(28.1,97.6) 28.1,100 29.347,101.247 29.347,102.55 30.775,103.978 30.775,104.722 30.497,105 30.2,105 30.2,105.35 R16.2
  Top Layer w1: v2(52.6,97.4) 52.7,97.3 VD1.1
  Bottom Layer w1: v1(28.1,96.9) 28.1,92.8 29,91.9 50.8,91.9 52.6,93.7 v2(52.6,97.4)
NetC3_1: C3.1 U1.5 ZQ1.2 ZQ1.3 | length 6.8
  Top Layer w0.2: U1.5 U1.5@45.85,107.2
  Top Layer w0.3: U1.5 47.094,107.25 47.194,107.15 47.25,107.15 48.4,106 ZQ1.2
  Top Layer w1: ZQ1.2 ZQ1.3 51.65,106 C3.1
NetC4_1: C4.1 U1.6 ZQ1.1 ZQ1.4 | length 7
  Top Layer w0.3: U1.6 47.302,107.75 47.401,107.65 47.65,107.65 48.1,107.2 48.95,108.05 ZQ1.1
  Top Layer w1: ZQ1.1 ZQ1.4 51.1,107.75 C4.1
NetC11_2: C11.2 R5.1 R6.2 U1.7 VD10.1 X6.4 | length 26.9
  Top Layer w0.2: U1.7 47.65,108.25
  Top Layer w0.3: X6.4@40.55,123.95 VD10.1 ; v1(47.05,122.775) 47.05,116.943 48.675,115.318 48.675,114.726 48.757,114.645 48.757,113.107 48.825,113.175 48.825,112.9 C11.2@48.825,112.775
  Top Layer w0.5: 47.65,108.25 48,108.6 48,109.045 48.3,109.37 48.3,109.475 R6.2@48.3,109.6 ; C11.2@49.068,112.782 49.068,110.943 R5.1 48.775,110.075 R6.2@48.3,109.6 ; R6.2@48.3,109.6 48.3,109.625 48.2,109.5 R6.2@48.3,109.6
  Bottom Layer w0.3: X6.4 41.675,122.825 47,122.825 v1(47.05,122.775)
NetDA2_2: DA2.2 R6.1 | length 3
  Top Layer w0.3: R6.1@49.8,109.5 52.55,109.5 DA2.2
NetFU1_2: FU1.2 R12.2 VT1.3 VT2.3 | length 11.9
  Top Layer w0.5: v1(50.4,95.8) 50.4,94.9 R12.2
  Top Layer w1: FU1.2 v1(46,97.8) ; VT2.3 50.2,95.6 50.3,95.7 50.3,95.8 VT1.3
  Bottom Layer w1: v1(46,97.8) 48,95.8 v1(50.4,95.8)
NetR1_1: R1.1 U1.53 X1.5 | length 15.6
  Top Layer w0.2: R1.1 38.28,100.555 38.812,101.087 38.812,101.15 38.812,101.625 38.5,101.937 U1.53
  Bottom Layer w0.2: v1(38.9,101.15) 38.9,101.334 38.7,101.534 39.4,102.234 39.4,105.678 41.077,107.355 42.005,107.355 42.06,107.3 43.584,107.3 44.015,107.731 44.321,107.731 X1.5
NetR1_2: R1.2 U1.54 X1.2 | length 11.8
  Top Layer w0.2: R1.2 37.64,100.915 37.827,101.102 37.827,101.127 37.9,101.2 v1@37.993,101.2 ; v1(38.7,105.3) 39,105 U1.54
  Bottom Layer w0.2: X1.2 37.74,106.26 v1(38.7,105.3) 39,105 39,102.4 37.941,101.341 37.9,101.3 38,101.2 38.005,101.205 v1(38.077,101.205)
NetR1_3: R1.3 U1.52 X1.1 | length 13.1
  Top Layer w0.2: R1.3 37,100.7 37.124,100.824 v1@37.124,101.3
  Top Layer w0.3: v1@37.124,101.3 37.216,101.391 38,102.176 U1.52
  Bottom Layer w0.2: X1.1 35.24,107.135 35.3,107.075 36.341,107.075 38,105.416 38,102.176 37.277,101.453 v1(37.277,101.33)
NetR1_4: R1.4 U1.51 X1.9 | length 14.7
  Top Layer w0.2: R1.4 36.4,100.14 36.4,100.7 36.3,100.8 v1(36.3,101.2) 37.5,102.4 U1.51@37.5,102.6
  Top Layer w0.3: U1.51@37.5,102.6 U1.51
  Bottom Layer w0.2: X1.9 34.715,106.675 36.175,106.675 37.5,105.35 37.5,102.4 v1(36.3,101.2)
NetR1_6: R1.6 U1.39 X1.7 | length 35.4
  Top Layer w0.2: v1(36.4,105.375) 38.025,107 38.025,109.779
  Top Layer w0.3: U1.39 34.8,109.85 35.616,109.85 35.766,110 37.803,110 37.902,109.902 38.025,109.779 38.25,110.004 v1(38.25,110.25)
  Bottom Layer w0.2: v1(36.4,105.375) 36.075,105.375 36,105.3 36,102.9 35.1,102 35.1,97.5 35.6,97 36.8,97 37,97.2 37,97.9 37.1,98 37.75,98.65 v1(38.35,98.65) ; v1(38.25,110.25) 39.057,110.25 39.507,109.8 39.707,110 48.29,110 48.59,110.3 X1.7
NetR1_7: R1.7 U1.14 X1.CD | length 38.7
  Top Layer w0.3: v1(37.64,97.46) R1.7 ; v1(44.3,112.15) 44.3,112.1 44.65,111.75 ; v1(44.45,106.681) 44.45,111.55 44.65,111.75 ; U1.14 44.65,111.75
  Bottom Layer w0.3: v1(37.64,97.46) 39.06,97.46 40.5,98.9 40.5,100.2 44.5,104.2 44.5,106.631 v1(44.45,106.681) ; v1(44.3,112.15) 44.3,113 48.9,117.6 48.9,119.3 53.02,123.42 X1.CD
NetR1_8: R1.8 U1.40 X1.8 | length 35.1
  Top Layer w0.2: v1(40.025,110.8) 39.475,110.25 39.475,106.425 39.637,106.262 40.2,105.7 v1(40.2,105)
  Top Layer w0.3: U1.40 35.85,109.25 36.327,108.773 v1(36.327,108.73)
  Bottom Layer w0.2: v1(36.327,108.73) 36.327,110.78 36.772,111.225 37.228,111.225 37.503,110.95 39.875,110.95 v1(40.025,110.8) 49.973,110.8 51.94,108.833 X1.8 ; v1(37,99.1) 37.4,99.1 37.6,99.3 38.3,99.3 39.8,100.8 39.8,104.6 v1(40.2,105)
NetR2_1: R2.1 U1.44 VD2.3 | length 18.7
  Top Layer w0.2: R2.1 31.5,101.7 31.5,105.8 32,106.3 ; v1(31.6,106.95) 31.6,106.7 32,106.3 ; 31.7,111.35 v1(31.7,112.2) ; U1.44 32.95,107.25 32,106.3
  Bottom Layer w0.2: v1(31.6,106.95) 31.6,109.5 31.4,109.7 31.7,110 v1(31.7,112.2)
NetR2_2: R2.2 X2.2 | length 2.4
  Top Layer w0.2: X2.2 X2.2@28.85,96.35 ; X2.2@28.9,96.35 R2.2
NetR3_1: R3.1 X2.3 | length 2.9
  Top Layer w0.2: X2.3 29.5,96.6 30.2,97.3 R3.1
NetR3_2: R3.2 R17.1 U1.45 VD2.1 | length 19.6
  Top Layer w0.2: v1(30.8,108.1) 31.5,108.8 VD2.1 ; 31.9,101.1 33,101.1 33,101.064 R17.1@33.298,100.765 ; 31.934,105.6 v1(32.5,105.6) ; R3.2 32.2,98.6 31.9,98.9 31.9,105.634 32.183,105.917 33.016,106.75 U1.45
  Bottom Layer w0.2: v1(30.8,108.1) 30.9,108 30.9,106.4 31.7,105.6 v1(32.5,105.6)
NetR4_1: R4.1 U1.60 | length 6.9
  Top Layer w0.3: R4.1 42.1,99.7 42.8,100.4 44.2,100.4 44.2,101 43.546,101.654 42.754,101.654 42,102.407 U1.60
NetR7_1: R7.1 U1.43 VD2.5 | length 13.9
  Top Layer w0.2: R7.1 28.6,110.5 VD2.5
  Top Layer w0.3: VD2.5 30.1,110.5 30.4,110.8 30.4,112.493 31.007,113.1 32.693,113.1 32.8,112.993 32.8,107.9 32.95,107.75 U1.43
NetR7_2: R7.2 X3.2 | length 7.5
  Top Layer w0.3: X3.2 27.2,105.4 27.2,106.7 27.8,107.3 27.8,109.3 26.6,110.5 R7.2
NetR8_1: R8.1 U1.57 | length 12.5
  Top Layer w0.3: R8.1 39.4,93.575 39.4,94.8 39.6,95 40.8,95 41.2,95.4 41.2,96.5 40.9,96.8 40.5,96.8 U1.57
NetR8_2: R8.2 VD5.2 | length 1.4
  Top Layer w0.3: VD5.2 40.85,93.7 R8.2
NetR9_2: R9.2 X5.6 | length 1.9
  Top Layer w0.3: R9.2 56.6,115.6 X5.6
NetR10_2: R10.2 U1.62 X1.WP | length 9.8
  Top Layer w0.3: U1.62 43,102.5 43.3,102.2 44.6,102.2 v1(45.3,102.9)
  Bottom Layer w0.3: v1(45.3,102.9) 50.75,102.9 X1.WP
NetR12_1: R12.1 VD9.2 VT2.1 | length 3.4
  Top Layer w1: VT2.1 49.8,93.8 50.3,93.3 R12.1 51.75,93.3 VD9.2
NetR13_1: R13.1 U1.29 | length 2.9
  Top Layer w0.3: U1.29 38,115.693 38.407,116.1 38.8,116.1 39.1,116.4 R13.1
NetR13_2: R13.2 X4.1 | length 20.7
  Top Layer w0.3: R13.2 39.225,118.525 v1(41.225,118.525) ; v1(47.75,118.5) 47.75,116.95 49.1,115.6 51.8,115.6 52.8,116.6 54.4,116.6 v1(54.6,116.8)
  Bottom Layer w0.3: v1(41.225,118.525) 47.725,118.525 v1(47.75,118.5) ; v1(54.6,116.8) 54.7,116.8 X4.1
NetR14_1: R14.1 U1.30 | length 2.4
  Top Layer w0.3: U1.30 37.5,115.9 37.9,116.3 R14.1
NetR14_2: R14.2 X4.2 | length 20.5
  Top Layer w0.3: R14.2 v1(37.9,119.7) ; v1(47.8,119.7) 50.9,119.7 52.1,120.9 54.9,120.9 55.3,120.5 X4.2
  Bottom Layer w0.3: v1(37.9,119.7) v1(47.8,119.7)
NetR15_1: R15.1 R16.1 U1.50 VD2.6 | length 15.6
  Top Layer w0.2: R15.1@29.2,106.125 29.2,106.2 R16.1 29.2,107.9 29.5,108.2 VD2.6 ; v1(34.75,102.575) 35.272,102.053 36.547,102.053 37,102.507
  Top Layer w0.3: R15.1 29.2,106.125 29.275,106.2 v1(29.5,106.2)
  Bottom Layer w0.2: v1(29.5,106.2) 30.534,106.2 31.534,105.2 32,105.2 32.6,104.6 32.635,104.635 34.546,104.635 35.35,103.831 35.35,102.978 34.848,102.477 34.775,102.403 34.75,102.428 v1(34.75,102.575)
NetR18_1: R18.1 U1.56 | length 12.4
  Top Layer w0.3: R18.1 37,93.7 37,94.9 37.3,95.2 38.5,95.2 39.2,95.9 39.2,96.6 40,97.4 U1.56
NetR18_2: R18.2 VD6.2 | length 1.4
  Top Layer w0.3: VD6.2 38.525,93.675 R18.2
NetR19_1: R19.1 U1.55 | length 12.5
  Top Layer w0.3: R19.1 36.5,93.5 36.5,95.9 37.4,96.8 38.6,96.8 39.5,97.7 U1.55
NetR19_2: R19.2 VD7.2 | length 1.4
  Top Layer w0.3: R19.2 35.075,93.7 VD7.2
NetR20_1: R20.1 U1.42 VD2.4 | length 14.1
  Top Layer w0.2: R20.1 28.2,112.45 VD2.4
  Top Layer w0.3: VD2.4 29.5,112.3 30.8,113.6 32.9,113.6 33.3,113.2 33.3,108.4 33.45,108.25 U1.42
NetR20_2: R20.2 X3.3 | length 7.9
  Top Layer w0.3: X3.3 26.3,107.1 27.3,108.1 27.3,109 26.929,109.371 26.529,109.371 25.8,110.1 25.8,112 R20.2
NetU1_1: U1.1 XS2.1 | length 27.5
  Top Layer w0.3: XS2.1 32.1,115.9 34.5,113.5 35.8,113.5 36.4,112.9 36.751,112.9 36.801,112.95 39.375,112.95 40.45,111.875 40.45,111.847 40.772,111.525 40.8,111.525 41.3,111.025 41.3,107.675 40.8,107.175 40.8,106.3 v1(40.6,106.1) ; v1(43.8,106.2) 43.8,105.875 44.425,105.25 U1.1
  Bottom Layer w0.3: v1(40.6,106.1) 40.7,106.2 v1(43.8,106.2)
NetU1_46: U1.46 X6.1 | length 20.8
  Top Layer w0.2: v1(37,110.675) 37,112.3 v1(37.05,112.35) ; X6.1@38.575,121.85 38.678,121.85 41.775,118.753 41.775,118.297 41.453,117.975 41.382,117.975 39.775,116.368 v1(39.775,115.875)
  Top Layer w0.3: U1.46 35.516,106.25 35.85,106.584 35.85,107.372 36.565,108.087 v1@36.634,108.156 ; v1(36.69,107.962) v1@36.69,108
  Bottom Layer w0.2: v1@36.634,108.056 v1@36.69,108 ; v1(36.69,107.962) v1@36.69,108 ; v1(37,110.675) 36.9,110.575 36.9,108.21 v1@36.69,108 ; v1(37.05,112.35) 37.05,113.35 39.575,115.875 v1(39.775,115.875)
NetU1_49: U1.49 X6.2 | length 28.1
  Top Layer w0.2: U1.49@36.5,103.175 U1.49
  Top Layer w0.3: U1.49 36.5,104.266 36.834,104.6 37.15,104.6 39.025,106.475 v1(39.025,111.975) ; X6.2 39.675,122.825 39.675,121.552 42.225,119.002 v1(42.225,117.925)
  Bottom Layer w0.3: v1(39.025,111.975) 39.025,113.6 41.24,115.815 43.367,115.815 43.885,116.333 43.885,117.067 43.367,117.585 42.29,117.585 42.225,117.65 v1(42.225,117.925)
NetU1_58: U1.58 X5.5 | length 25.4
  Top Layer w0.3: U1.58 41,105.1 41.3,105.4 41.3,106.4 41.705,106.805 v1(41.777,106.805) ; v1(52.9,112.9) 56.64,112.9 X5.5
  Bottom Layer w0.3: v1(41.777,106.805) 43.725,106.805 44.201,107.281 46.819,107.281 48.2,105.9 49.4,107.1 52.4,107.1 52.9,107.6 v1(52.9,112.9)
NetU1_59: U1.59 X5.4 | length 23.9
  Top Layer w0.3: U1.59 41.5,102.2 42.7,101 v1(43.3,101) ; v1@53.4,102.1 v1(53.1,102.1) 54.8,103.8 54.8,108.52 X5.4
  Bottom Layer w0.3: v1(43.3,101) 52,101 v1(53.1,102.1)
NetVT1_1: VT1.1 VT2.2 | length 4.2
  Top Layer w0.2: VT2.2 VT2.2@47.3,95.1
  Top Layer w0.75: VT2.2 46.9,96.4 47.7,97.2 VT1.1
OSC_N: C10.1 U1.4 ZQ2.1 | length 8.8
  Top Layer w0.3: U1.4 46.85,106.75 47.8,105.8 47.8,103.5 48.825,103.5 ZQ2.1
  Top Layer w0.4: ZQ2.1 51.175,104.175 C10.1
OSC_P: C9.1 U1.3 ZQ2.2 | length 7.8
  Top Layer w0.2: U1.3 46.65,106.25 47.35,105.55 C9.1
  Top Layer w0.4: C9.1 49.425,101.75 ZQ2.2
Power: FU1.1 X3.1 | length 28
  Top Layer w1: v3@43.6,94.6 v2(43.6,95.6)
  Bottom Layer w1: X3.1 29.05,99.75 29.05,97.682 29.6,97.132 29.6,93.2 43.5,93.2 43.6,93.3 v3(43.6,94.3) v2(43.6,95.6)
pads on no net: "X1.Mount Hole" DA1.5 R1.9 U1.2 U1.8 U1.9 U1.10 U1.11 U1.15 U1.16 U1.17 U1.20 U1.21 U1.22 U1.23 U1.24 U1.25 U1.26 U1.27 U1.28 U1.33 U1.34 U1.35 U1.36 U1.37 U1.38 U1.41 U1.61 X1.Mount X2.4 X5.3 X6.3
copper on no net:
  other v1: 45.8,93.3

## Polygon pours and split planes (outlines as drawn)
GND on Top Layer "Bot GND" (solid, remove dead copper, pour order 6): 24.875,127.85 58.1,127.85 58.15,127.8 58.1,127.75 58.1,90.85 24.9,90.85 24.875,90.825
GND on Bottom Layer "Bot GND" (solid, remove dead copper, pour order 8): 25,127.85 25.1,127.75 58.075,127.75 58.075,90.875 58.125,90.825 57.925,91.025 24.95,91.025

## Keep-outs
Keep-Out Layer:
  lines w0.254: 55.3,127.7 58.2,127.7 58.2,99 58.2,91 25,91 25,127.7 32.775,127.7 48.325,127.7 56.1,127.7